# Altium PCB PCB1.PcbDoc
Units mm, origin at the board's own origin, x right, y up, seen from the top; angles counter-clockwise.
Board outline 73.02 x 40.26 mm, 2 copper layers (Top Layer, Bottom Layer); 28 components, 14 nets, 70 pads, 26 vias.
Unrouted connection lines stored in the file: 22.
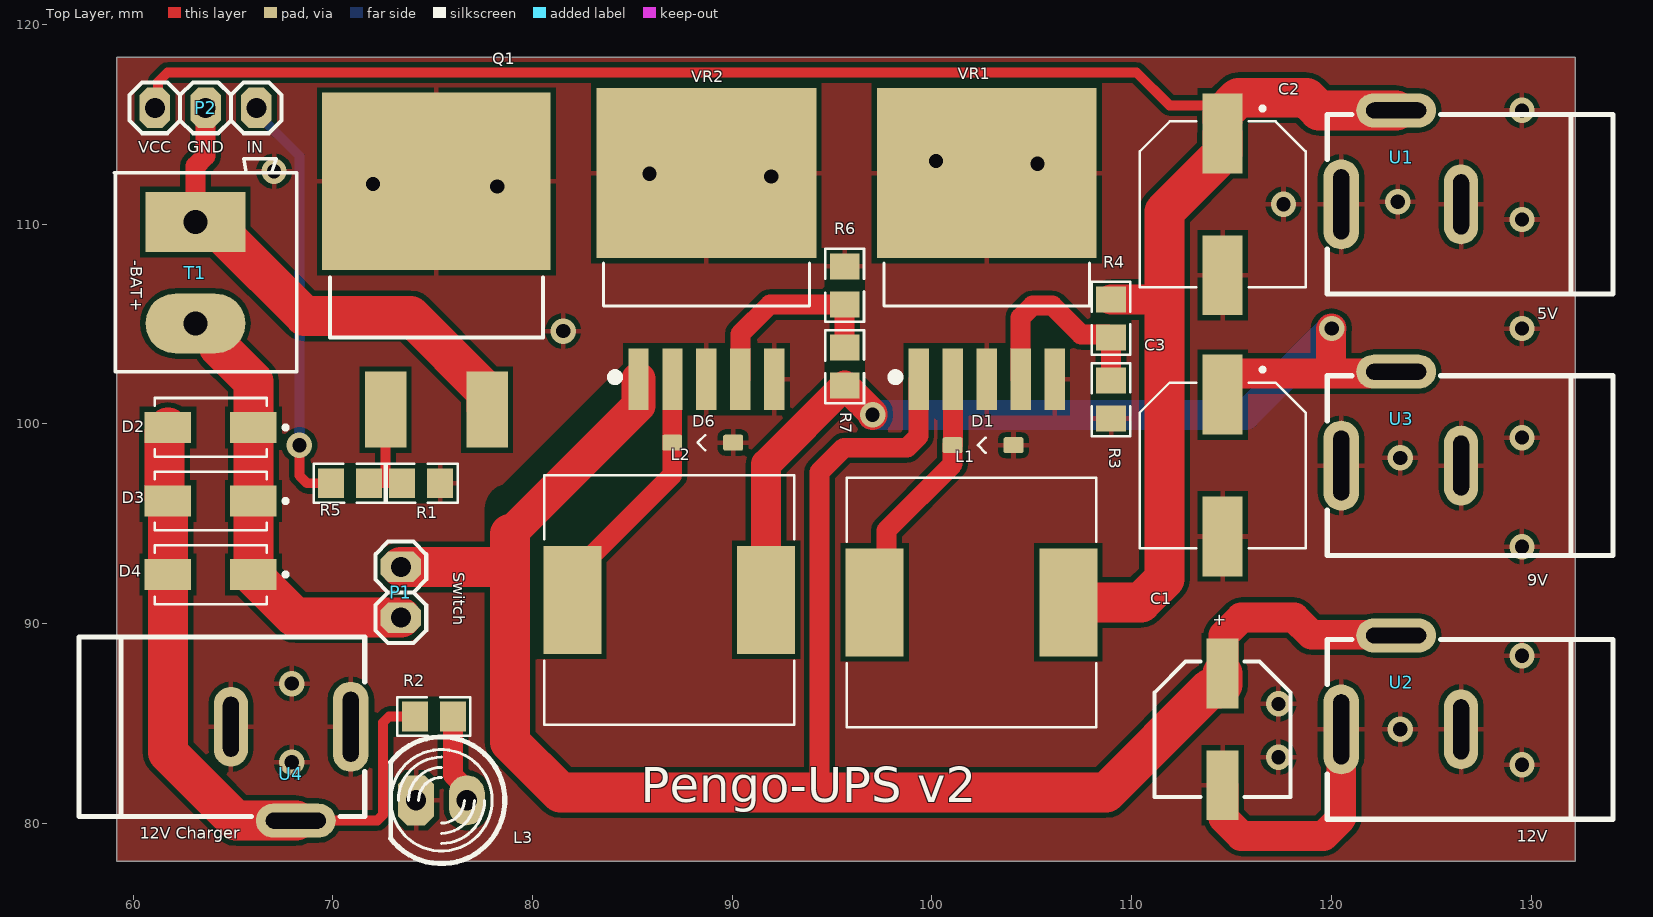
[diagram p0: Top Layer view]
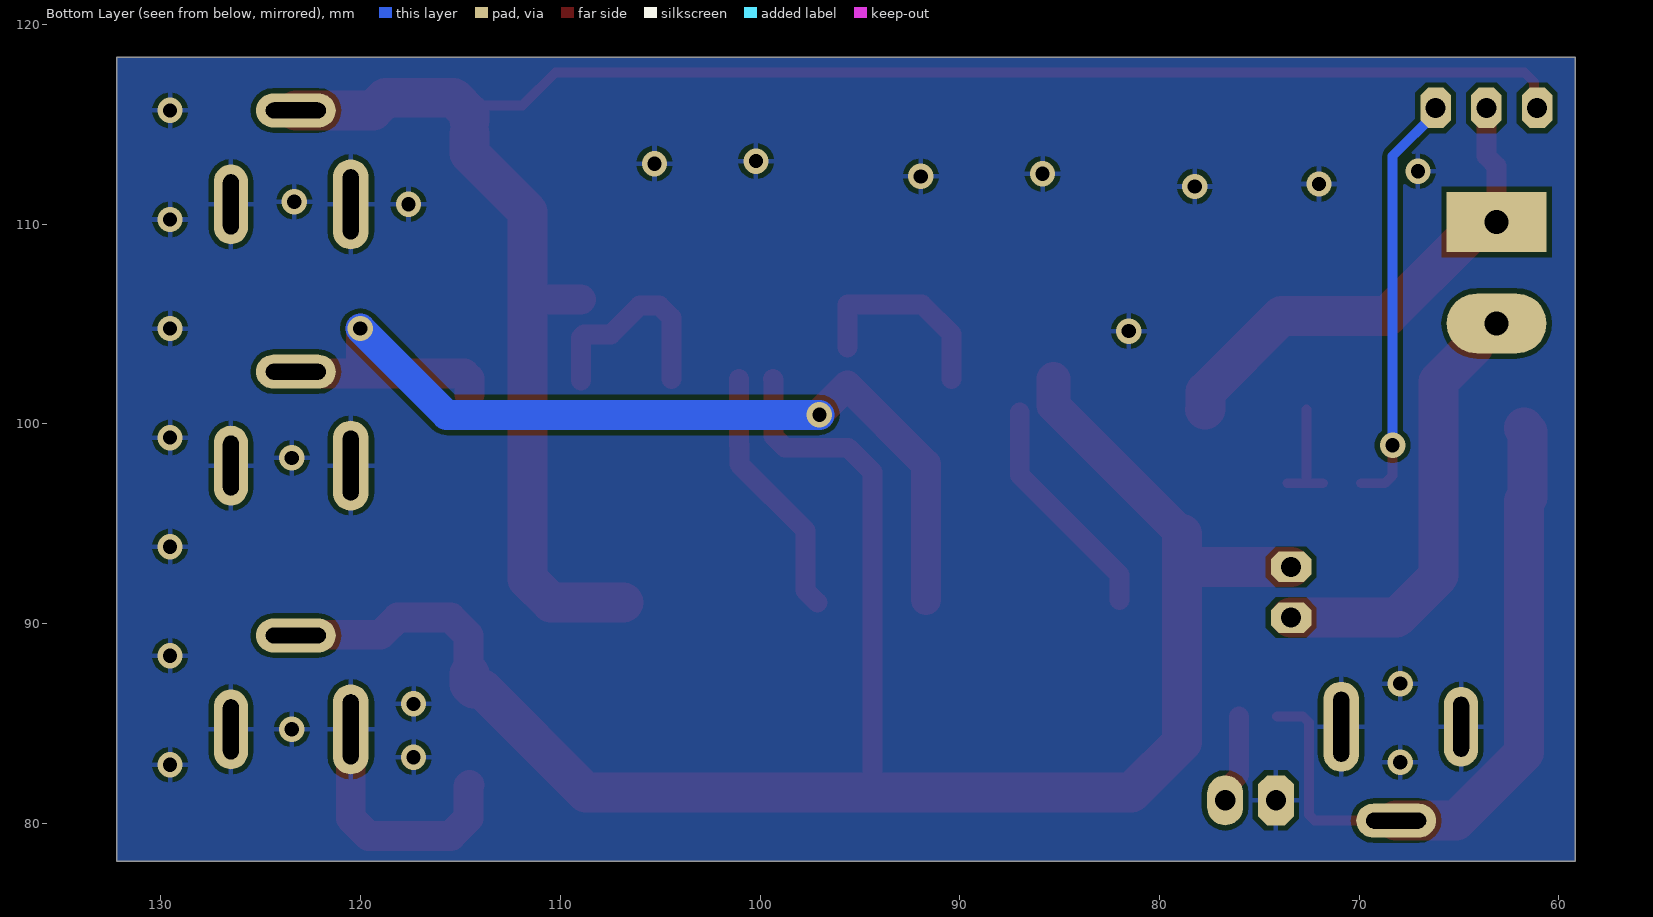
[diagram p1: Bottom Layer view, seen from below]
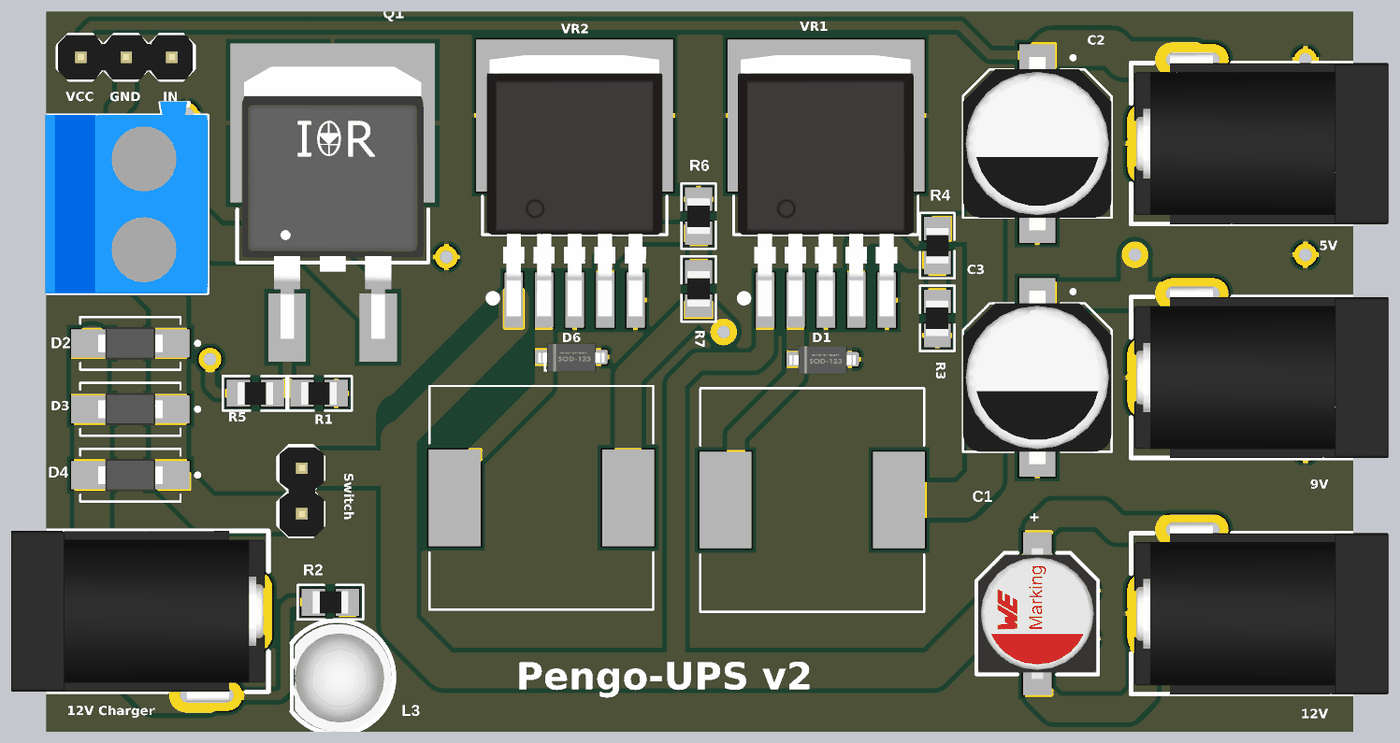
[diagram p2: 3D render of the assembled board from above, using the file's embedded part models]

## Layer stack, top to bottom
Top Solder: solder mask 0.0102, Solder Resist, Dk 3.5
Top Layer: signal copper 0.0356
Dielectric 1: dielectric 0.32, FR-4, Dk 4.8
Bottom Layer: signal copper 0.0356
Bottom Solder: solder mask 0.0102, Solder Resist, Dk 3.5

## Board outline
59.182,78.105 59.182,118.364 132.207,118.364 132.207,78.105

## Design rules (kind name [scope] priority, off if disabled: settings)
Clearance [All] p1: gap=0.254 ignorepadtopadclearanceinfootprint=FALSE except(0: Arc-Hole Track-Hole SMDPad-Hole THPad-Hole Via-Hole Fill-Hole Poly-Hole Region-Hole Text-Hole)
PolygonConnect [All] p1: connectstyle=Relief reliefconductorwidth=0.254 reliefentries=4 polygonreliefangle="90 Angle" airgapwidth=0.254
RoutingVias [All] p1: holewidth=0.711 width=1.27 viastyle="Through Hole" minholewidth=0.711 minwidth=1.27 maxholewidth=0.711 maxwidth=1.27
SolderMaskExpansion [All] p1: expansion=0.102 istentingtop=FALSE
Width [All] p1: maxlimit=5 minlimit=0.5 preferedwidth=3
30 further rules are at their usual default settings.

## Components (designator, comment, footprint, x,y, rotation, side; value= is the part's Value field where it differs from the comment)
C1 "4.7µF" WCAP-PSLP_D6.3H7.7 114.554,84.709 r90 top value=470uF/16V
C2 "CAP ALUM 220uF ±20% 16V SMD" CAP-220 114.554,110.994 r270 top value=220uF/16V
C3 "CAP ALUM 220uF ±20% 16V SMD" CAP-220 114.554,97.913 r270 top value=220uF/16V
D1 "DIODE SCHOTTKY 40V SMA(DO-214AC)" SOD-123 102.557,98.933 r180 top value=40V/3A
D2 "DIODE SCHOTTKY 40V SMA" DIODE-214AC 63.881,99.822 r180 top value=40V-5A
D3 "DIODE SCHOTTKY 40V SMA" DIODE-214AC 63.881,92.456 r180 top value=40V-5A
D4 "DIODE SCHOTTKY 40V SMA" DIODE-214AC 63.881,96.139 r180 top value=40V-5A
D6 "DIODE SCHOTTKY 40V SMA(DO-214AC)" SOD-123 88.519,99.06 r180 top value=40V/3A
L1 "FIXED IND 33uH 3A 65m SMD,12x12mm" INDP125125X600N 101.981,91.059 r180 top value=33uH
L2 "FIXED IND 33uH 3A 65m SMD,12x12mm" INDP125125X600N 86.844,91.186 r180 top value=33uH
L3 "LED" LED_5mm_G 75.438,81.153 r180 top value="RED LED"
P1 "Header 2" My_1X02 73.406,92.837 r90 top
P2 "Header 3" My_1X03 63.627,115.824 r0 top
Q1 "MOSFET N-CH 60V 60A TO-263 SMD" TO-263 75.184,107.696 r0 top value=IRFZ44
R1 "RES 220 ±5% 125mW 0805" RES_0805 70.866,97.028 r0 top value=220R
R2 "RES 1K 125mW 0805" RES_0805 75.057,85.344 r0 top value=1k
R3 "RES 2K 125mW 0805" RES_0805 108.966,101.219 r270 top value=2k
R4 "RES 6.2K 125mW 0805" RES_0805 108.966,105.283 r90 top value=6.2k
R5 "RES 100k ±5% 125mW 0805" RES_0805 74.422,97.028 r0 top value=100k
R6 "RES 2K 125mW 0805" RES_0805 95.631,106.934 r90 top value=2k
R7 "RES 12.7K 125mW 0805" RES_0805 95.631,102.87 r270 top value=12.7k
T1 "Terminal" "KF301 2Pin" 63.119,110.109 r0 top
U1 "DC-062A-4A-2.0" Plugin 126.493,110.998 r270 top value="DC Jack"
U2 "DC-062A-4A-2.0" Plugin 126.493,84.709 r270 top value="DC Jack"
U3 "DC-062A-4A-2.0" Plugin 126.493,97.917 r270 top value="DC Jack"
U4 "DC-062A-4A-2.0" Plugin 64.896,84.832 r90 top value="DC Jack"
VR1 "LM2596S-5.0" TO-263-5 102.714,106.745 r270 top value=LM2596S-5.0(UMW)
VR2 "LM2596S-5.0" TO-263-5 88.676,106.745 r270 top value=LM2596S-5.0(UMW)

## Footprints (in the part's own frame and the unit in brackets; to place one, negate y for a bottom-side part, rotate by r counter-clockwise, add the part's x,y. Pads: shape width x height; smd on the part's side, far side on the other; paste and mask are expansions set on the pad)
CAP-220 [mm]
  rect 4x2 smd: 1(-3.55,0) 2(3.55,0)
  silkscreen extent -4.9,-4.15 4.15,4.15, body extent -4.85,-4.15 4.85,4.15, height 10.2
DIODE-214AC [mm]
  rect 2.33x1.56 smd: A(2.14,0) C(-2.14,0)
  silkscreen extent -3.85,-1.48 2.8,1.48, body extent -1.8,-0.9 1.8,0.9, height 1.43
INDP125125X600N [mm]
  rect 2.9x5.4 smd: 1(-4.85,0) 2(4.85,0)
  silkscreen extent -6.25,-6.25 6.25,6.25, body extent -6.27,-6.32 6.23,6.18, height 6.29
"KF301 2Pin" [mm]
  rect 5x3 hole 1.2: 1(0,0)
  oval 5x3 hole 1.2: 2(0,-5.08)
  silkscreen extent -4.06,-7.49 5.08,3.17, body extent -3.99,-7.5 5.08,3.24, height 12.52
LED_5mm_G [mm]
  oval 1.8x2.5 hole 1.016: A(-1.27,0)
  oct 1.8x2.5 hole 1.016: K(1.27,0)
  silkscreen extent -3.17,-3.17 2.54,3.17, body extent -3.05,-2.97 2.37,3.05, height 12.31
My_1X02 [mil]
  oct 60x80 hole 39.37: 1(-100,0) 2(0,0)
  silkscreen extent -150,-50 50,50, body extent -150,-51 46,47, height 323
My_1X03 [mil]
  oct 60x80 hole 39.37: 1(-100,0) 2(0,0) 3(100,0)
  silkscreen extent -150,-50 150,50, body extent -149,-49 147,49, height 323
Plugin [mm]
  oval 4.5x1.8 hole 0.8 slot 3.5 at 0 deg: 1(0.004,-6.001)
  oval 1.7x4 hole 0.8 slot 3 at 90 deg: 2(-4.696,-3.251)
  oval 4x1.7 hole 0.8 slot 3 at 0 deg: 3(0.004,-0.001)
  silkscreen extent -4.5,-6.7 4.5,7.6, body extent -5.04,-6.52 4.51,7.68, height 11
RES_0805 [mm] "Resister"
  rect 1.3x1.5 smd mask+0.076: 1(0.95,0) 2(-0.95,0)
  silkscreen extent -1.83,-0.97 1.83,0.97, body extent -1,-0.63 1,0.62, height 0.5
SOD-123 [mm]
  rrect25% 1x0.8 smd: A(-1.524,0) K(1.524,0)
  silkscreen extent -0.13,-0.38 0.25,0.38, body extent -1.85,-0.76 1.85,0.84, height 1.25
TO-263 [mm]
  rect 2.08x3.81 smd paste+0 mask+0: 1(-2.54,-6.985) 3(2.54,-6.985)
  rect 11.43x8.89 smd paste+0 mask+0: 4(0,4.445)
  silkscreen extent -5.34,-3.36 5.34,-0.38, body extent -5.81,-8.99 5.81,8.99, height 0.25
TO-263-5 [mm]
  rect 3.083x1.02 smd: 1(4.507,-3.371) 2(4.507,-1.671) 3(4.507,0.029) 4(4.507,1.729) 5(4.507,3.429)
  rect 8.5x11 smd: 6(-5.813,0.029)
  silkscreen extent -1.31,-5.13 4.6,5.19, body extent -9.19,-4.89 5.41,4.93, height 4.22
WCAP-PSLP_D6.3H7.7 [mm] "Aluminum Polymer Capacitors, body diameter 6.3mm"
  rect 3.5x1.6 smd: 1(2.8,0) 2(-2.8,0)
  silkscreen extent -3.4,-3.4 3.4,3.4, body extent -3.65,-3.3 3.65,3.3, height 7.7

## Part data
C1: library part "CAP ALUM 470uF ±20% 16V SMD", "470uF 16V 230mA@120Hz ±20% SMD,D6.3xL7.7mm Aluminum Electrolytic Capacitors - SMD ROHS", LCSC Part #=C46550400, Manufacturer=JIERR, Mfr. Part #=JVJ16V470M6x8, Package=SMD,D6.3xL7.7mm
C2 C3: "220uF 16V 110mA@120Hz ±20% SMD,D6.3xL7.7mm Aluminum Electrolytic Capacitors - SMD ROHS", LCSC=C970695, LCSC Part #=C2887273, Manufacturer=KNSCHA, Mfr. Part #=RVT220UF16V67RV0015, Package=SMD,D6.3xL7.7mm
D1 D6: "40V Independent 550mV@3A 3A SMA(DO-214AC) Schottky Diodes ROHS", LCSC Part #=C908680, Manufacturer=GOODWORK, Mfr. Part #=SS34, Package=SMA(DO-214AC)
D2 D3 D4: "40V 700mV@5A 5A SMA Schottky Diodes ROHS", LCSC Part #=C22368714, Manufacturer=SMA(DO-214AC), Mfr. Part #=SS54, Package=SMA
L1 L2: "3A 33uH Magnetic Shielded Inductor ±20% SMD,12x12mm Power Inductors ROHS", LCSC Part #=C339951, Manufacturer=YJYCOIN, Mfr. Part #=YPRH1207-330M, Package=SMD,12x12mm
L3: library part "LED RED RED LENS TH", "20mA 300mcd Red Lens 615nm~625nm -25℃~+85℃ Red 35° 5mm Round Lens 80mW 2.4V Through Hole,D=5mm LED Indication - Discrete ROHS", LCSC Part #="Altium Limited", Manufacturer=XINGLIGHT, Mfr. Part #="Re-released for DXP Platform.", Package="Through Hole,D=5mm"
P1: "Header, 2-Pin", ASiD Part Number="Header 2-AS"
P2: "Header, 3-Pin", ASiD Part Number="Header 3-AS"
Q1: "60V 60A 12mΩ@10V,25A 87W 3V 1 N-Channel TO-263 MOSFETs ROHS", LCSC Part #=C7587862, Manufacturer=Minos, Mfr. Part #=IRFZ44NS, Package=TO-263
R1: "125mW Thick Film Resistor 150V ±100ppm/℃ ±5% 220Ω 0805 Chip Resistor - Surface Mount ROHS", LCSC Part #=C2933537, Manufacturer=FOJAN, Mfr. Part #="FRC0805J221 TS", Package=0805
R2: "125mW Thick Film Resistor 150V ±100ppm/℃ ±5% 1kΩ 0805 Chip Resistor - Surface Mount ROHS", LCSC Part #=C25623, Manufacturer=UNI-ROYAL, Mfr. Part #=0805W8J0102T5E, Package=0805
R3 R6: "125mW Thick Film Resistor 150V ±100ppm/℃ ±1% 2kΩ 0805 Chip Resistor - Surface Mount ROHS", LCSC Part #=C114572, Manufacturer=YAGEO, Mfr. Part #=RC0805FR-072KL, Package=0805
R4: "125mW Thick Film Resistor 150V ±100ppm/℃ ±1% 6.2kΩ 0805 Chip Resistor - Surface Mount ROHS", LCSC Part #=C114535, Manufacturer=YAGEO, Mfr. Part #=RC0805FR-076K2L, Package=0805
R5: "125mW Thick Film Resistor 150V ±100ppm/℃ ±5% 100kΩ 0805 Chip Resistor - Surface Mount ROHS", LCSC Part #=C2907293, Manufacturer=FOJAN, Mfr. Part #="FRC0805J104 TS", Package=0805
R7: "125mW Thick Film Resistor ±100ppm/℃ ±1% 12.7kΩ 0805 Chip Resistor - Surface Mount ROHS", LCSC Part #=C20162867, Manufacturer=YAGEO, Mfr. Part #=RC0805FR-1312K7L, Package=0805
T1: library part "TERM BLK 2POS 5mm TH", "1x2P -30℃~+120℃ 17.5A 250V Blue 14~22 Through Hole 5mm 1.5 1 2 Through Hole,P=5mm Screw Terminal Blocks ROHS", LCSC Part #=C8475, Manufacturer=KANGNEX, Mfr. Part #=WJ301V-5.0-2P, Package="Through Hole,P=5mm"
U1 U2 U3 U4: LCSC Part #=C5147479, Manufacturer="XKB Connection", Package="Through Hole,Right Angle", Mfr. Part #=DC-062A-4A-2.0
VR1 VR2: "Buck Fixed 7V~40V 5V 3A TO-263-5 DC-DC Converters ROHS", LCSC Part #=C347421, Manufacturer=UMW, Mfr. Part #=LM2596S-5.0(UMW), Package=TO-263-5

## Via types
v1: diameter 1.27, hole 0.711, Top Layer to Bottom Layer, 23 vias
v2: diameter 1.27/1.27 (per signal layer), hole 0.711, Top Layer to Bottom Layer, 3 vias

## Nets (pads, with @x,y where several pads share a name; then routed paths per layer and width w, separated by ;. In a path a pad name is that pad's centre, name@x,y a point inside that pad or via, vN(x,y) a via of type N, cw(c..) or ccw(c..) an arc to the next point about the centre after c; other vN are vias at no path point)
+5V: C2.1 L1.1 P2.1 R4.1 U1.2 | length 97.7
  Top Layer w0.5: P2.1 61.244,115.981 61.244,117.124 61.722,117.602 110.236,117.602 111.887,115.951 113.804,115.951 114.554,115.201 C2.1
  Top Layer w1.5: R4.1 111.567,106.233 111.633,106.299
  Top Layer w2: L1.1 110.461,91.059 111.633,92.231 111.633,106.299 111.633,110.623 114.554,113.544 C2.1 ; C2.1@114.554,115.201 114.554,115.544 115.342,116.332 118.745,116.332 119.383,115.694 U1.2
+9V: C3.1 L2.1 R7.1 U3.2 | length 51
  Top Layer w1.5: L2.1 91.694,97.983 R7.1 97.028,100.523 v2(97.028,100.457) ; C3.1 114.554,102.271 114.804,102.521 119.98,102.521 121.858,102.521 121.912,102.575 123.204,102.575 U3.2 ; 119.98,102.651 119.98,104.74 v2(120.015,104.775)
  Bottom Layer w1.5: v2(97.028,100.457) 115.697,100.457 v2(120.015,104.775)
+BAT: D2.C D3.C D4.C P1.1 T1.2 | length 22.5
  Top Layer w2: T1.2 63.848,105.029 64.31,104.567 64.31,103.838 66.021,102.127 D2.C D4.C D3.C 66.021,92.401 68.125,90.297 P1.1
+Cha: D2.A D3.A D4.A R2.2 U4.2 | length 35.1
  Top Layer w0.5: U4.2 72.224,80.136 72.517,80.429 72.517,85.051 72.81,85.344 R2.2
  Top Layer w2: D2.A 61.741,99.767 61.57,99.596 61.57,97.152 61.576,97.146 61.576,96.304 D4.A D3.A 61.741,83.547 65.152,80.136 U4.2
GND: C1.2 C2.2 C3.2 D1.A D6.A L3.K Q1.4 R3.1 R5.1 R6.1 U1.1 U1.3 U2.1 U2.3 U3.1 U3.3 U4.1 U4.3 VR1.3 VR1.5 VR1.6 VR2.3 VR2.5 VR2.6 | length 12.7
  Top Layer w1.5: C1.2 114.604,81.859 114.604,80.254 115.483,79.375 119.613,79.375 120.492,80.254 U2.1
  other v1: 129.54,82.931 67.945,83.058 117.348,83.312 123.444,84.709 117.348,85.979 67.945,86.995 129.54,88.392 129.54,93.853 123.444,98.298 129.54,99.314 81.534,104.648 129.54,104.775 129.54,110.236 117.602,110.998 123.317,111.125 78.232,111.887 72.009,112.014 91.948,112.395 85.852,112.522 67.056,112.649 105.283,113.03 100.203,113.157 129.54,115.697
NetD1_K: D1.K L1.2 VR1.2 | length 12.8
  Top Layer w1: L1.2 97.721,91.649 97.721,94.673 101.033,97.985 D1.K 101.043,98.943 VR1.2
NetD6_K: D6.K L2.2 VR2.2 | length 11.5
  Top Layer w1: L2.2 81.994,92.436 86.995,97.437 D6.K 86.995,100.584
NetL3_A: L3.A R2.1 | length 4.5
  Top Layer w1: R2.1 76.007,82.42 76.708,81.719 L3.A
NetP2_2: P2.2 Q1.3 T1.1 | length 25.1
  Top Layer w1: T1.1 63.119,112.903 63.627,113.411 P2.2
  Top Layer w2: T1.1 64.119,110.109 64.619,109.609 64.619,109.371 68.58,105.41 73.89,105.41 77.684,101.616 77.684,100.751 Q1.3
NetP2_3: P2.3 R1.2 | length 21.1
  Top Layer w0.5: v2(68.326,98.933) 68.326,97.409 68.707,97.028 R1.2
  Bottom Layer w0.5: P2.3 66.167,115.57 68.326,113.411 v2(68.326,98.933)
NetQ1_1: Q1.1 R1.1 R5.2 | length 5.5
  Top Layer w0.5: R1.1 72.644,97.028 ; Q1.1 72.644,97.028 ; R5.2@73.599,97.028 R5.2 72.644,97.028
NetR3_2: R3.2 R4.2 VR1.4 | length 10.7
  Top Layer w1: VR1.4 104.443,105.332 105.029,105.918 106.029,105.918 107.464,104.483 108.816,104.483 R4.2 R3.2
NetR6_2: R6.2 R7.2 VR2.4 | length 10.3
  Top Layer w1: VR2.4 90.415,102.248 90.415,104.512 91.887,105.984 R6.2 R7.2
VCC: C1.1 P1.2 U2.2 VR1.1 VR2.1 | length 101.9
  Top Layer w1: 94.361,81.534 94.361,97.582 95.585,98.806 98.747,98.806 99.333,99.392 99.333,102.228 VR1.1
  Top Layer w1.5: C1.1 114.604,87.559 114.604,89.418 115.483,90.297 118.146,90.297 119,89.443 123.204,89.443 U2.2
  Top Layer w1.7: 78.867,94.488 85.305,100.926 VR2.1
  Top Layer w2: P1.2 78.486,92.837 78.867,92.456 ; 78.867,94.488 78.867,92.456 ; C1.1 114.554,86.959 114.354,86.759 113.937,86.759 108.712,81.534 94.361,81.534 81.407,81.534 78.867,84.074 78.867,92.456

## Polygon pours and split planes (outlines as drawn)
GND on Bottom Layer "Bottom layer" (solid, remove dead copper, pour order 1): 59.182,78.105 59.182,118.364 132.207,118.364 132.207,78.105
GND on Top Layer "GND_L01_P002" (solid, remove dead copper, pour order 2): 59.182,78.105 59.182,118.364 132.207,118.364 132.207,78.105

## Silkscreen, mask and mechanical layers (free items; w line width, h text height)
Top Overlay:
  text "VCC" at 60.266,113.369 h1
  text "GND" at 62.713,113.37 h1
  text "IN" at 65.697,113.369 h1
  text "-BAT+" at 59.69,108.204 h1 r270
  text "5V" at 130.302,105.042 h1
  text "Switch" at 75.831,92.583 h1 r270
  text "9V" at 129.794,91.706 h1
  text "Pengo-UPS v2" at 85.417,80.47 h3
  text "12V Charger" at 60.325,79.038 h1
  text "12V" at 129.286,78.867 h1

## Text inside footprints (layer, text, board x,y; h text height)
C1: Top Overlay "+" at 114.869,89.835 h1 r90